# Altium PCB 电源.PcbDoc
Units mil, origin at the board's own origin, x right, y up, seen from the top; angles counter-clockwise.
Board outline 3265 x 2000 mil, 2 copper layers (Top Layer, Bottom Layer); 12 components, 6 nets, 66 pads, 0 vias.
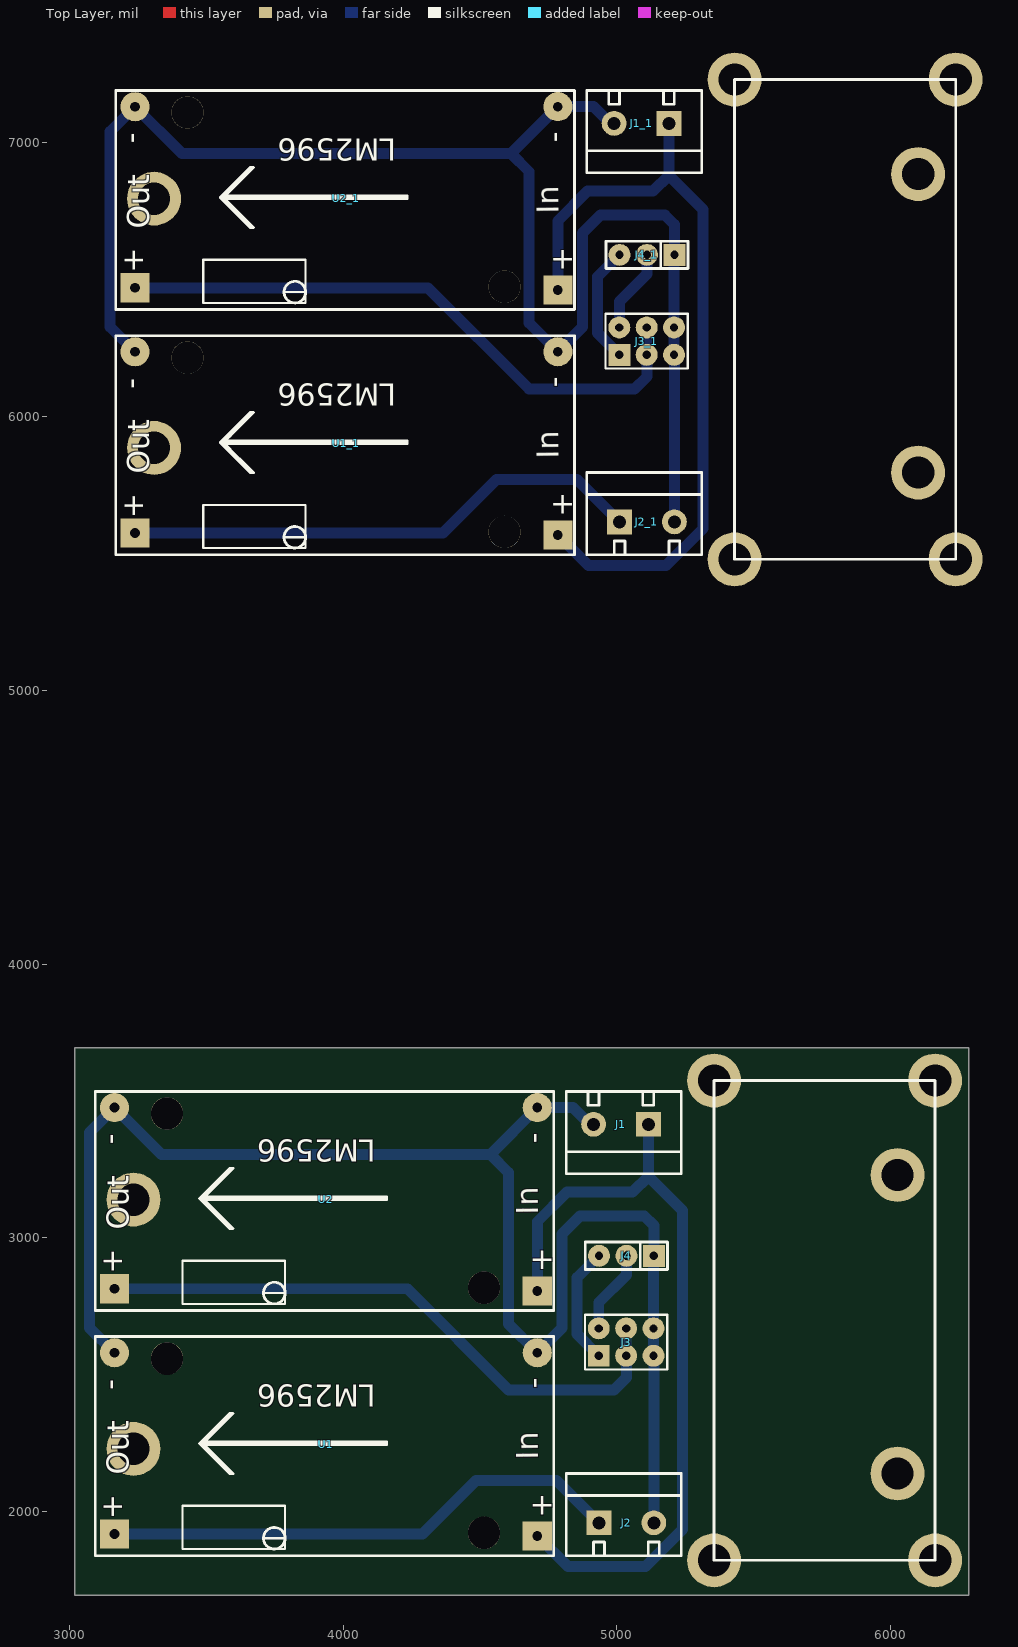
[diagram p0: Top Layer view]
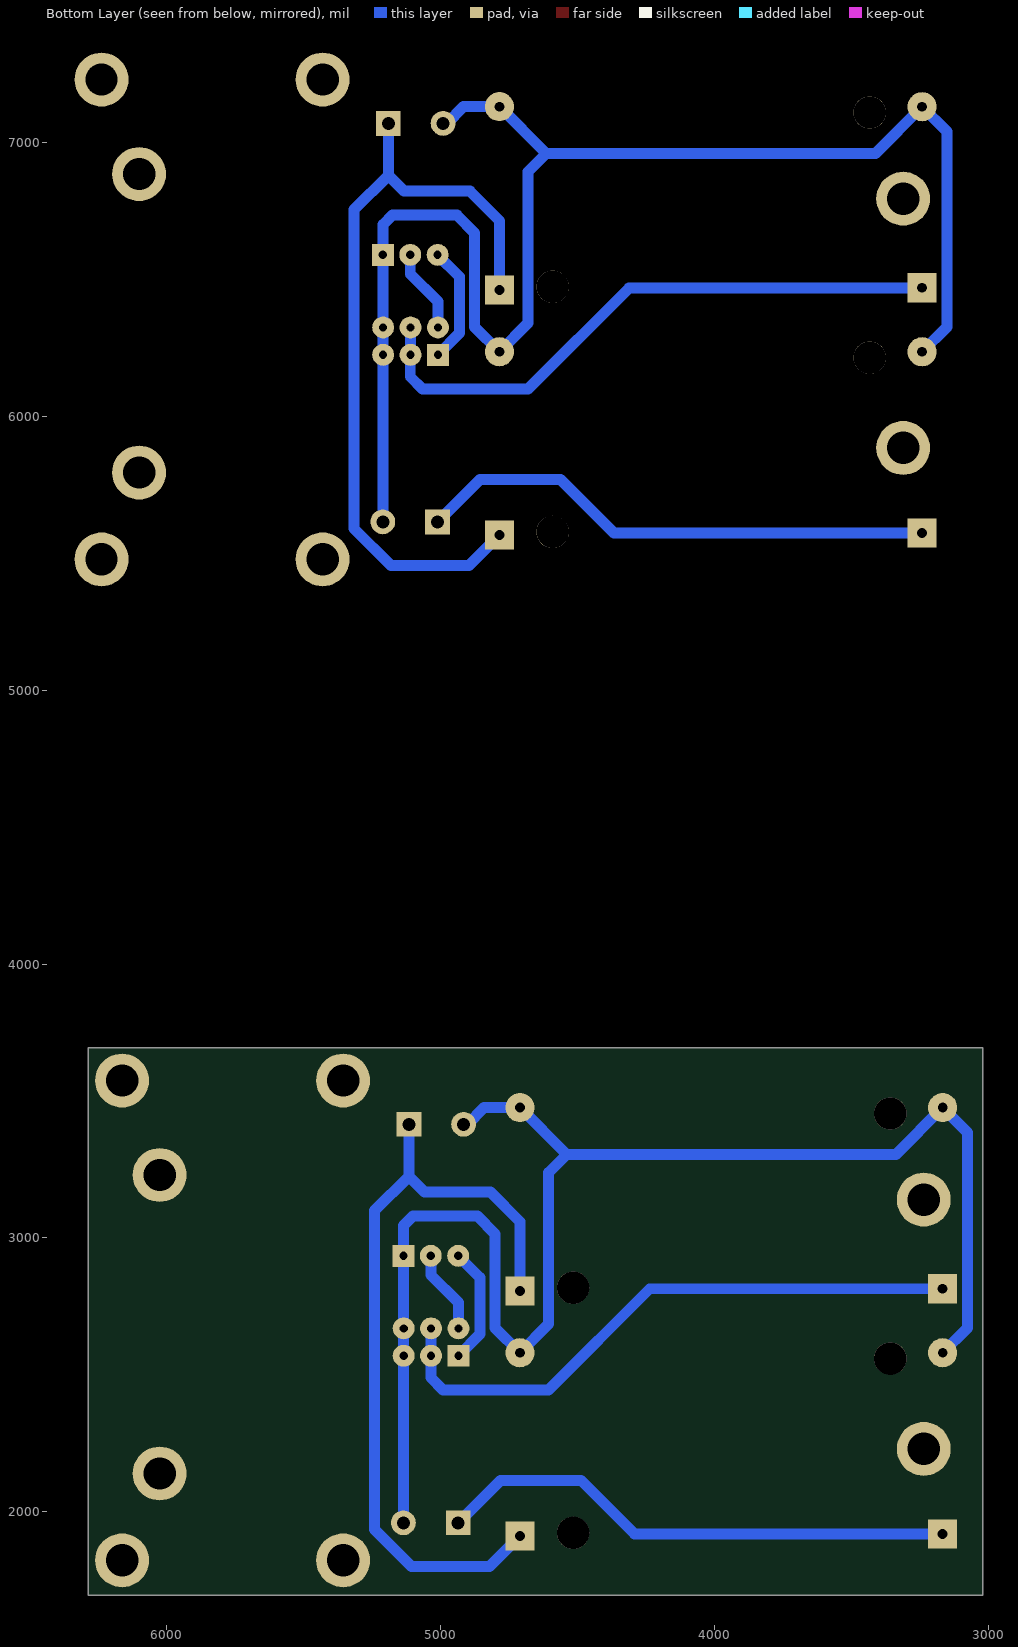
[diagram p1: Bottom Layer view, seen from below]

## Layer stack, top to bottom
Top Solder: solder mask 0.4, Solder Resist, Dk 3.5
Top Layer: signal copper 1.4
Dielectric 1: dielectric 12.6, FR-4, Dk 4.8
Bottom Layer: signal copper 1.4
Bottom Solder: solder mask 0.4, Solder Resist, Dk 3.5

## Board outline
3020,1695 6285,1695 6285,3695 3020,3695

## Design rules (kind name [scope] priority, off if disabled: settings)
Clearance [All] p1: gap=10 ignorepadtopadclearanceinfootprint=FALSE except(0: Arc-Hole Track-Hole SMDPad-Hole THPad-Hole Via-Hole Fill-Hole Poly-Hole Region-Hole Text-Hole)
PolygonConnect [All] p1: connectstyle=Relief reliefconductorwidth=10 reliefentries=4 polygonreliefangle="90 Angle" airgapwidth=10
RoutingVias [All] p1: holewidth=28 width=50 viastyle="Through Hole" minholewidth=28 minwidth=50 maxholewidth=28 maxwidth=50
SolderMaskExpansion [All] p1: expansion=4 istentingtop=FALSE
Width [All] p1: maxlimit=100 minlimit=30 preferedwidth=40
30 further rules are at their usual default settings.

## Classes and differential pairs
component class 电源: J1 J2 J3 J4 U1 U2

## Components (designator, comment, footprint, x,y, rotation, side; value= is the part's Value field where it differs from the comment)
J1 "KF301-2P" KF301-5.0-2P 5115,3415 r180 top
J1_1 "KF301-2P" KF301-5.0-2P 5190,7070 r180 top (schematic designator J1)
J2 "KF301-2P" KF301-5.0-2P 4935,1960 r0 top
J2_1 "KF301-2P" KF301-5.0-2P 5010,5615 r0 top (schematic designator J2)
J3 "Pin HDR2X3" "Pin HDR2X3/2.54mm-S" 4933.94,2570 r0 top
J3_1 "Pin HDR2X3" "Pin HDR2X3/2.54mm-S" 5008.94,6225 r0 top (schematic designator J3)
J4 "Pin HDR1X3" "Pin HDR1X3/2.54mm-S" 5135,2935 r270 top
J4_1 "Pin HDR1X3" "Pin HDR1X3/2.54mm-S" 5210,6590 r270 top (schematic designator J4)
U1 "LM2596模块-29AH" LM2596 3942.2,2240 r180 top
U1_1 "LM2596模块-29AH" LM2596 4017.2,5895 r180 top (schematic designator U1)
U2 "LM2596模块-29AH" LM2596 3942.2,3135 r180 top
U2_1 "LM2596模块-29AH" LM2596 4017.2,6790 r180 top (schematic designator U2)

## Footprints (in the part's own frame and the unit in brackets; to place one, negate y for a bottom-side part, rotate by r counter-clockwise, add the part's x,y. Pads: shape width x height; smd on the part's side, far side on the other; paste and mask are expansions set on the pad)
KF301-5.0-2P [mm] "可拼接端子/6A"
  rect 2.3x2.3 hole 1.2: 1(0,0)
  round 2.3 hole 1.2: 2(5.08,0)
  silkscreen extent -3.05,-3.05 7.62,4.57, body extent -3,-3.09 7.5,4.51, height 10.05
LM2596 [mm]
  rect 2.7x2.7 hole 0.91: 1(-19.487,8.338) 3(19.719,8.137)
  round 2.7 hole 0.91: 2(-19.489,-8.663) 4(19.721,-8.66)
  round 3 hole 3 unplated: ""(-14.549,8.043) ""(14.862,-8.119)
  silkscreen extent -21.03,-10.16 21.51,10.16
"Pin HDR1X3/2.54mm-S" [mil]
  rect 80x80 hole 30: 1(0,0)
  round 80 hole 30: 2(0,-100) 3(0,-200)
  silkscreen extent -50,-250 50,50, body extent -50,-250 50,50, height 336
"Pin HDR2X3/2.54mm-S" [mil] "Connector; Header; 3x2 Position"
  rect 80x80 hole 30: 1(0,0)
  round 80 hole 30: 2(0,100) 3(100,0) 4(100,100) 5(200,0) 6(200,100)
  silkscreen extent -50,-50 250,150, body extent -50,-50 250,150, height 298

## Free pads (board coordinates)
  round 196.85 hole 118.11: ""(3235,2230) ""(3235,3140) ""(3310,5885) ""(3310,6795) ""(5355,1823.03) ""(5355,3575) ""(5430,5478.03) ""(5430,7230) ""(6025,2140) ""(6025,3230) ""(6100,5795) ""(6100,6885) ""(6162.09,1823.03) ""(6162.09,3575) ""(6237.09,5478.03) ""(6237.09,7230)

## Nets (pads, with @x,y where several pads share a name; then routed paths per layer and width w, separated by ;. In a path a pad name is that pad's centre, name@x,y a point inside that pad or via, vN(x,y) a via of type N, cw(c..) or ccw(c..) an arc to the next point about the centre after c; other vN are vias at no path point)
6V: J3.3 J3.4 U2.3 | length 2221.3
  Bottom Layer w40: U2.3 4235.36,2814.64 4605,2445 4990,2445 5035,2490 5035,2568.94 J3.3 J3.4
12V: J2.1 U1.3 | length 1914.3
  Bottom Layer w40: U1.3 4290.36,1919.64 4485.72,2115 4780,2115 J2.1
24V: J1.1 U1.1 U2.1 | length 2891.5
  Bottom Layer w40: U1.1 4821.12,1800 5105,1800 5240,1935 5240,3100 5115,3225 ; U2.1 4709.39,3059.39 4817.5,3167.5 5057.5,3167.5 5115,3225 ; J1.1 5115,3225
GND: J1.2 J2.2 J3.5 J3.6 J4.1 U1.2 U1.4 U2.2 U2.4 | length 5609.9
  Bottom Layer w40: U1.4 3075,2671.76 3075,3385.16 U2.4 3336.76,3305 4538.44,3305 ; J1.2 4901.32,3415 4840.26,3476.06 U2.2 4538.44,3305 ; J2.2 5135,2568.94 J3.5 J3.6 5134.47,2670.53 5134.47,2929.47 J4.1@5135,2930 ; J4.1 5135,3045 5100,3080 4865,3080 4800,3015 4800,2671.56 U1.2 4605,2685.56 4605,3238.44 4538.44,3305
PWM1: J3.2 J4.2 | length 306.9
  Bottom Layer w40: J3.2 4933.94,2763.94 5035,2865 J4.2
PWM2: J3.1 J4.3 | length 430.8
  Bottom Layer w40: J3.1 4855,2648.94 4855,2855 J4.3
pads on no net: J1_1.1 J1_1.2 J2_1.1 J2_1.2 J3_1.1 J3_1.2 J3_1.3 J3_1.4 J3_1.5 J3_1.6 J4_1.1 J4_1.2 J4_1.3 U1. U1_1. U1_1.1 U1_1.2 U1_1.3 U1_1.4 U2. U2_1. U2_1.1 U2_1.2 U2_1.3 U2_1.4
copper on no net: | length 13374.6
  Bottom Layer w40: 3240.8,6235.96 3150,6326.76 3150,7040.16 3240.8,7130.96 3411.76,6960 4613.44,6960 ; 3240.87,5574.64 4365.36,5574.64 4560.72,5770 4855,5770 5010,5615 ; 3240.87,6469.64 4310.36,6469.64 4680,6100 5065,6100 5110,6145 5110,6223.94 5108.94,6225 5108.94,6325 ; 4784.4,5566.72 4896.12,5455 5180,5455 5315,5590 5315,6755 5190,6880 ; 4784.39,6461.72 4784.39,6714.39 4892.5,6822.5 5132.5,6822.5 5190,6880 ; 4990,7070 4976.32,7070 4915.26,7131.06 4784.5,7131.06 4613.44,6960 ; 5008.94,6225 4930,6303.94 4930,6510 5010,6590 ; 5008.94,6325 5008.94,6418.94 5110,6520 5110,6590 ; 5190,7070 5190,6880 ; 5210,5615 5210,6223.94 5208.94,6225 5208.94,6325 5209.47,6325.53 5209.47,6584.47 5210,6585 ; 5210,6590 5210,6700 5175,6735 4940,6735 4875,6670 4875,6326.56 4784.5,6236.06 4680,6340.56 4680,6893.44 4613.44,6960

## Silkscreen, mask and mechanical layers (free items; w line width, h text height)
Top Overlay:
  lines w10: 5355,1823.03 6162.09,1823.03 6162.09,3575 5355,3575 5355,1823.03 ; 5430,5478.03 5430,7230 6237.09,7230 6237.09,5478.03 5430,5478.03
Mechanical 1:
  lines w10: 3020,1695 3020,3695 6285,3695 6285,1695 3020,1695 ; 3095,5350 6360,5350 6360,7350 3095,7350 3095,5350

## Text inside footprints (layer, text, board x,y; h text height)
U1: Top Overlay "LM2596" at 4119.8,2463.66 h80 r180; Top Overlay "Out" at 3217.2,2135 h80 r90; Top Overlay "In" at 4712.2,2190 h80 r90.62; Top Overlay "-" at 3127.2,2485 h80 r270; Top Overlay "-" at 4672.2,2490 h80 r270; Top Overlay "+" at 4682.2,1990 h80; Top Overlay "+" at 3127.2,2065 h80 r270
U1_1: Top Overlay "LM2596" at 4194.8,6118.66 h80 r180; Top Overlay "Out" at 3292.2,5790 h80 r90; Top Overlay "In" at 4787.2,5845 h80 r90.62; Top Overlay "-" at 3202.2,6140 h80 r270; Top Overlay "-" at 4747.2,6145 h80 r270; Top Overlay "+" at 4757.2,5645 h80; Top Overlay "+" at 3202.2,5720 h80 r270
U2: Top Overlay "LM2596" at 4119.8,3358.66 h80 r180; Top Overlay "Out" at 3217.2,3030 h80 r90; Top Overlay "In" at 4712.2,3085 h80 r90.62; Top Overlay "-" at 3127.2,3380 h80 r270; Top Overlay "-" at 4672.2,3385 h80 r270; Top Overlay "+" at 4682.2,2885 h80; Top Overlay "+" at 3127.2,2960 h80 r270
U2_1: Top Overlay "LM2596" at 4194.8,7013.66 h80 r180; Top Overlay "Out" at 3292.2,6685 h80 r90; Top Overlay "In" at 4787.2,6740 h80 r90.62; Top Overlay "-" at 3202.2,7035 h80 r270; Top Overlay "-" at 4747.2,7040 h80 r270; Top Overlay "+" at 4757.2,6540 h80; Top Overlay "+" at 3202.2,6615 h80 r270